# EAGLE board eeZeePowerJack (EAGLE 6.4)
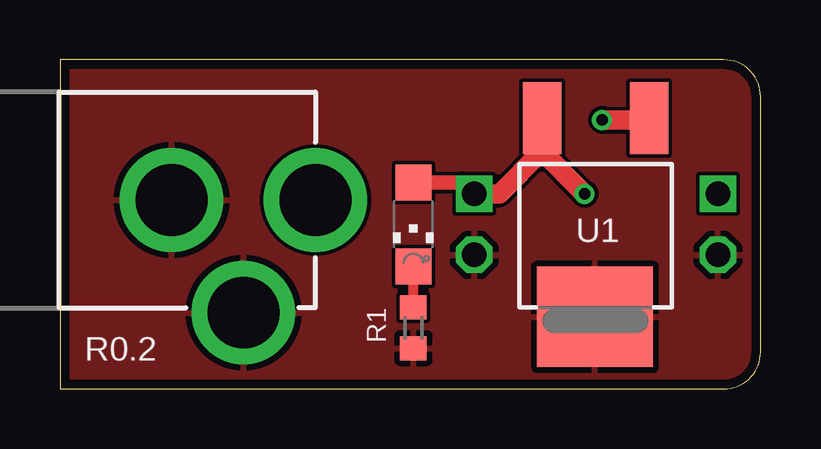
[diagram p0: board, top side]
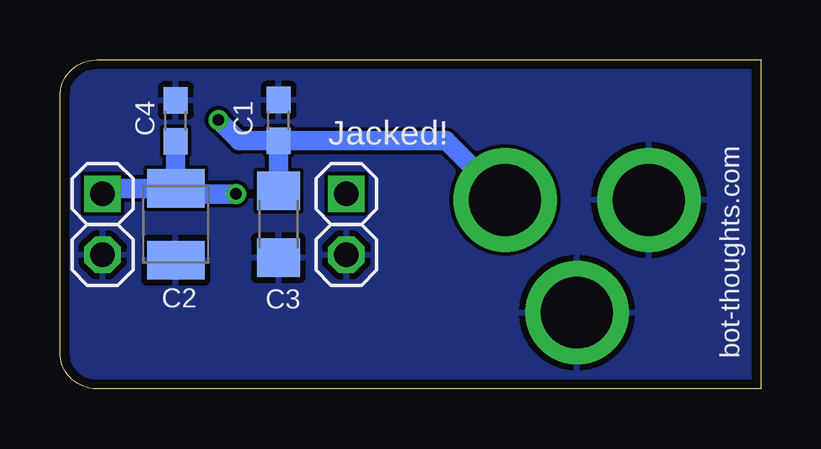
[diagram p1: board, bottom side, seen from below]

Size 29.21 x 13.72 mm. Coordinates in mm from the lower left corner, seen from the top.
Outline: 0,0 27.69,0 arc90 29.21,1.52 29.21,12.19 arc90 27.69,13.72 0,13.72 0,0
Copper layers (1*16): Top 0.0356mm / dielectric 1.5011mm / Bottom 0.0356mm
Design rules "LaenPCBOrder *": minimum track width 6mil, minimum drill 13mil, track to track 6mil, track to pad 6mil, pad to pad 6mil, via to via 6mil, smd to smd 6mil, copper to edge 15mil, drill to drill 6mil, minimum pad ring 7mil, minimum via ring 7mil, stop-mask expansion 4mil, vias tented up to drill 20mil, thermal gap 10mil

## Footprints (pad centres in the part's own frame; a part is rotated, then mirrored left to right if it is on the bottom)
C0603 = smd 1.1 x 1: 1 -0.85,0; 2 0.85,0
SMC_B = smd 1.6 x 2.4: + -1.5,0; - 1.5,0
C1206 = smd 1.6 x 1.8: 1 -1.4,0; 2 1.4,0
POWER_JACK_PTH = drill 2.997 pad 4.318: GND 0,7.7; GNDBREAK 4.7,10.7; PWR 0,13.7
1X02-S = drill 1.016 square: 1 -1.27,0 | drill 1.016 octagon: 2 1.27,0
CHIPLED_1206 = smd 1.5 x 1.5: A 0,-1.75; C 0,1.75
R0603 = smd 1 x 1.1: 1 -0.85,0; 2 0.85,0
DPAK = smd 1.6 x 2.997: 1 -2.261,-3.658; 3 2.21,-3.658 | smd 4.826 x 4.191: 4 0,4.623

## Placement (x,y rotation side)
C1  0.1uF  [C0603]  20.09,11.19 90 bottom
C2  100uF  [SMC_B]  24.38,6.86 270 bottom
C3  10uF  [C1206]  20.1,6.86 270 bottom
C4  0.1uF  [C0603]  24.38,11.18 90 bottom
J1  POWER_JACK  [POWER_JACK_PTH]  -3.05,7.87 270 top
JP3  [1X02-S]  17.27,6.86 270 bottom
JP4  [1X02-S]  27.43,6.86 270 bottom
LED1  [CHIPLED_1206]  14.73,6.86 180 top
R1  330  [R0603]  14.73,2.54 90 top
U1  LF50CDT  [DPAK]  22.31,7.63 180 top

## Library data of the parts
C1 C3 = rcl; VOLTAGE: 25V
C2 C4 = rcl
J1 = SparkFun-Connectors
JP3 JP4 = pinhead-2
LED1 = led
R1 = resistor
U1 = bt_regulator

## Nets
GND: C1.2 C2.- C3.2 C4.2 J1.GND J1.GNDBREAK JP3.2 JP4.2 R1.1 U1.4
N$5: LED1.C R1.2
VIN: C1.1 C3.1 J1.PWR U1.1
VOUT: C2.+ C4.1 JP3.1 JP4.1 LED1.A U1.3

## Tracks (layer width: path | path; a pad name or v marks a point on that pad's centre or on a via)
GND
  pour Top (rank 3): 0,13.72 27.69,13.72 arc-90 29.21,11.94 29.21,1.52 arc-90 27.69,0 0,0
  pour Bottom (rank 2): 0,13.72 27.69,13.72 arc-90 29.21,11.94 29.21,1.27 arc-90 27.69,0 0,0
N$5
  Top 0.406: R1.2 LED1.C
VIN  (via drill 0.48)
  Top 0.813: v22.6,11.21 24.79,11.21 U1.1
  Bottom 0.813: C1.1 13.12,10.34 J1.PWR | C1.1 21.73,10.34 v22.6,11.21 | C3.1 20.1,10.23 C1.1
VOUT  (via drill 0.48)
  Top 0.61: LED1.A 16.79,8.61 JP3.1
  Top 0.813: U1.3 20.1,9.9 | 20.1,9.9 18.32,8.13 JP3.1 | v21.87,8.13 20.1,9.9
  Bottom 0.813: C4.1 C2.+ | v21.87,8.13 24.15,8.13 C2.+ | C2.+ 27.2,8.36 JP4.1

## Text on the board
tPlace: R0.2
bPlace: bot-thoughts.com
bNames: Jacked!
tValues: 3.3V | VCC | 5V | GND
bValues: eeZee Power
tsilk: eeZee Power | Jacked! | VCC | GND | 5V 3.3V
bsilk: Rev 0.2 | bot-thoughts.com